# Altium PCB 搅拌杯PCB.PcbDoc
Units mil, origin at the board's own origin, x right, y up, seen from the top; angles counter-clockwise.
Board outline 1417.32 x 1279.53 mil, 2 copper layers (Top Layer, Bottom Layer); 83 components, 49 nets, 213 pads, 50 vias.
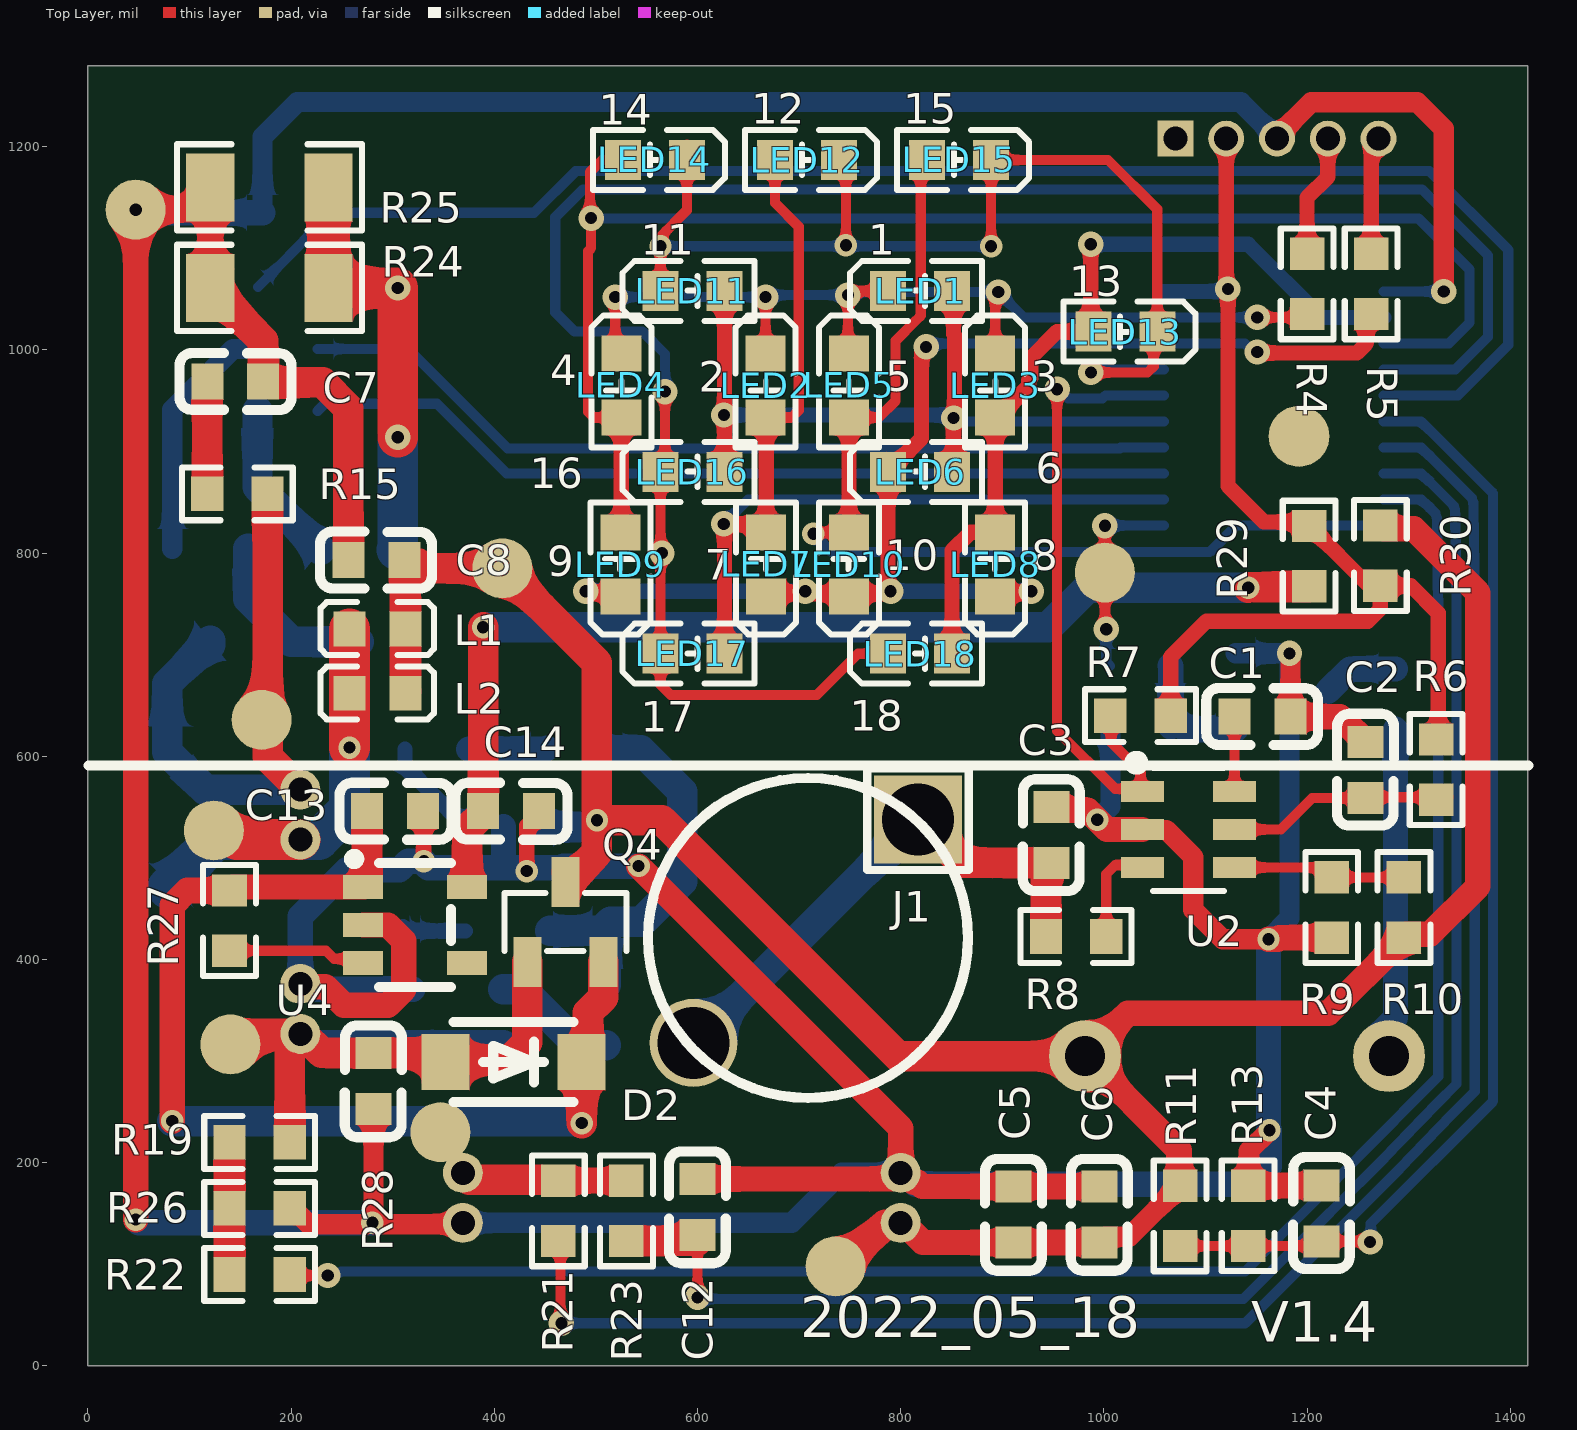
[diagram p0: Top Layer view]
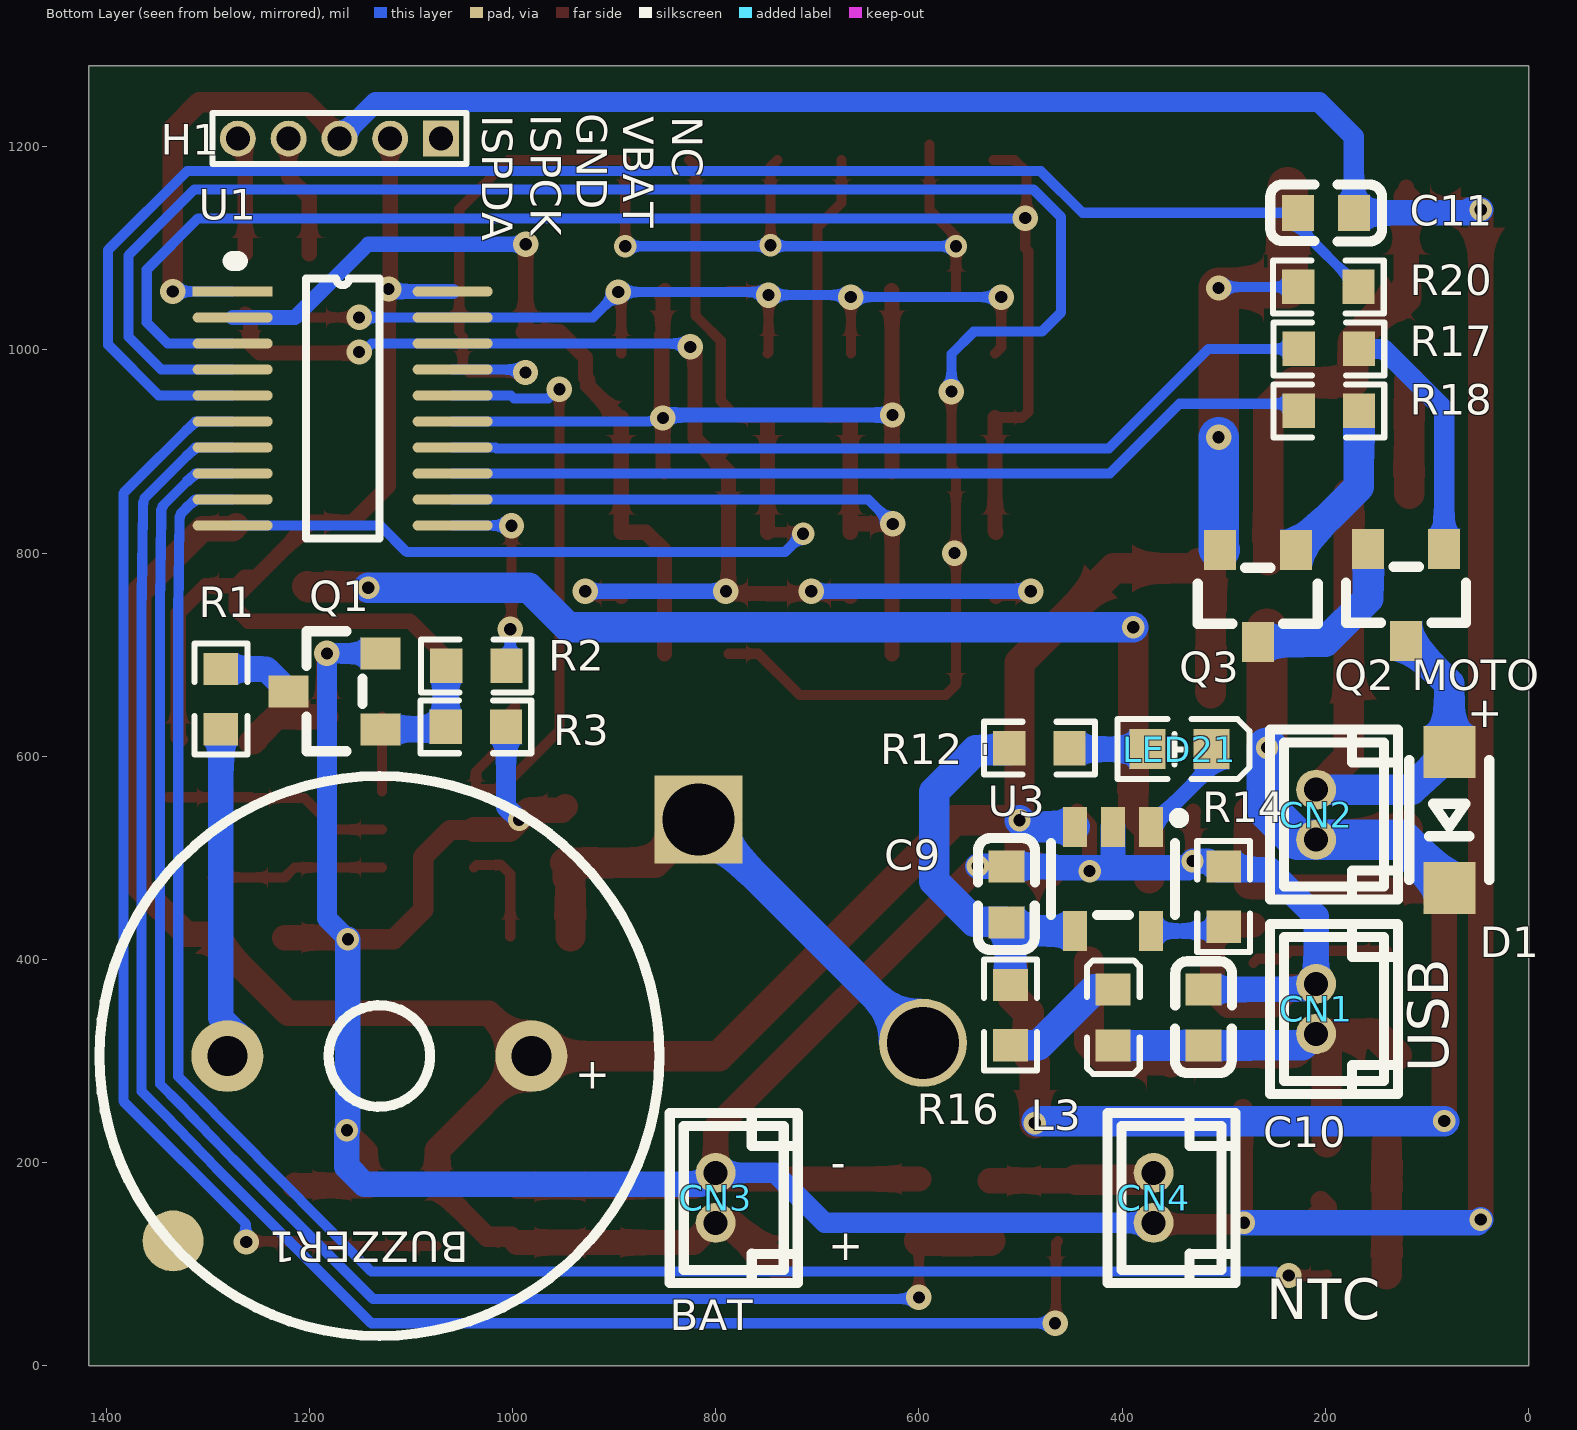
[diagram p1: Bottom Layer view, seen from below]

## Layer stack, top to bottom
Top Solder: solder mask 0.4, Solder Resist, Dk 3.5
Top Layer: signal copper 1.4
Dielectric2: dielectric 12.6, FR-4, Dk 4.8
Bottom Layer: signal copper 1.4
Bottom Solder: solder mask 0.4, Solder Resist, Dk 3.5

## Board outline
0,0 0,1279.53 1417.32,1279.53 1417.32,0

## Design rules (kind name [scope] priority, off if disabled: settings)
Clearance [All] p1: gap=8 ignorepadtopadclearanceinfootprint=FALSE except(0: Arc-Hole Track-Hole SMDPad-Hole THPad-Hole Via-Hole Fill-Hole Poly-Hole Region-Hole Text-Hole)
ComponentClearance [All] p1 off: gap=10 collisioncheckmode=3 verticalgap=10 showdistances=FALSE
PolygonConnect [All] p1: connectstyle=Relief reliefconductorwidth=10 reliefentries=4 polygonreliefangle="90 Angle" airgapwidth=10
RoutingVias [All] p1: holewidth=28 width=50 viastyle="Through Hole" minholewidth=10 minwidth=10 maxholewidth=28 maxwidth=50
SolderMaskExpansion [All] p1: expansion=4 istentingtop=FALSE
Width [All] p1: maxlimit=50 minlimit=8 preferedwidth=10
29 further rules are at their usual default settings.

## Components (designator, comment, footprint, x,y, rotation, side; value= is the part's Value field where it differs from the comment)
BUZZER1 "FMQ-BUZZER2" BUZ-TH_BD12.0-P7.60-D0.6-FD 1131,305 r0 bottom
C1 "4.7nF" C0603 1156,639 r0 top
C2 "0.1u" C0603 1257.24,586.54 r270 top
C3 "nc" C0603 948.22,522.69 r90 top
C4 "0.1u" C0603 1214,150.23 r270 top
C5 "1uF" C0603 911,149 r90 top
C6 "0.1u" C0603 995.5,149 r90 top
C7 "0.1u" C0603 145,969 r180 top
C8 "10uF" C0603 283.81,793 r0 top
C9 "4.7uF" C0603 514,464.19 r270 bottom
C10 "10uF" C0603 320,343 r270 bottom
C11 "0.1u" C0603 199.44,1135 r0 bottom
C12 "0.1u" C0603 600,156.44 r90 top
C13 "10uf" C0603 302.44,546 r180 top
C14 "1u" C0603 416.55,546 r180 top
CN1 "0530470210" CONN-TH_0530470210 209,351.39 r90 bottom
CN2 "0530470210" CONN-TH_0530470210 209,542.61 r90 bottom
CN3 "0530470210" CONN-TH_0530470210 800,165.39 r90 bottom
CN4 "0530470210" CONN-TH_0530470210 369,165.39 r90 bottom
D1 "1N4148W" SOD-123FL_L2.6-W1.6-LS3.4-RD 78,537.33 r270 bottom
D2 "1N5819HW-7-F" SOD-123_L2.8-W1.8-LS3.7-FD 419,299 r0 top
H1 "HDR-F-2.54_1x5" 1.27mm_5PIN 1070.34,1208 r0 bottom
J1 "HDR-M-2.54_1x1" HDR-M-2.54_1X1 817,538 r0 top
L1 "22uH" L0603 285,725.35 r0 top
L2 "22uH" L0603 285,662 r0 top
L3 "BEAD" L0603 409,343 r270 bottom
LED1 "LED-0603_W" LED0603-FD_WHITE 819,1058 r180 top
LED2 "LED-0603_W" LED0603-FD_WHITE 667,965 r90 top
LED3 "LED-0603_W" LED0603-FD_WHITE 893,965 r90 top
LED4 "LED-0603_W" LED0603-FD_WHITE 525,965 r90 top
LED5 "LED-0603_W" LED0603-FD_WHITE 749,965 r90 top
LED6 "LED-0603_W" LED0603-FD_WHITE 819,880 r180 top
LED7 "LED-0603_W" LED0603-FD_WHITE 667.53,789 r270 top
LED8 "LED-0603_W" LED0603-FD_WHITE 893,789 r270 top
LED9 "LED-0603_W" LED0603-FD_WHITE 524,789 r270 top
LED10 "LED-0603_W" LED0603-FD_WHITE 749,789 r270 top
LED11 "LED-0603_W" LED0603-FD_WHITE 595,1058 r180 top
LED12 "LED-0603_W" LED0603-FD_WHITE 707.75,1187 r0 top
LED13 "LED-0603_W" LED0603-FD_WHITE 1021,1018 r0 top
LED14 "LED-0603_W" LED0603-FD_WHITE 558,1187 r0 top
LED15 "LED-0603_W" LED0603-FD_WHITE 857.51,1187 r0 top
LED16 "LED-0603_W" LED0603-FD_WHITE 595,880 r180 top
LED17 "LED-0603_W" LED0603-FD_WHITE 595,701 r180 top
LED18 "LED-0603_W" LED0603-FD_WHITE 819,701 r180 top
LED21 "LED-0603_W" LED0603-FD_WHITE 343.5,607 r180 bottom
Q1 "2N7002" SOT-23_L2.9-W1.3-P0.95-LS2.4-BR 1175.07,664.01 r180 bottom
Q2 "2N7002" SOT-23_L2.9-W1.3-P0.95-LS2.4-BR 120.43,759 r90 bottom
Q3 "2N7002" SOT-23_L2.9-W1.3-P0.95-LS2.4-BR 266.43,758 r90 bottom
Q4 "KI2301" SOT-23-3_L2.9-W1.3-P1.90-LS2.4-BR 470,437 r270 top
R1 "50R" R0603 1287,656.35 r90 bottom
R2 "1K" R0603 1035.66,689 r180 bottom
R3 "100K" R0603 1036.07,629.01 r180 bottom
R4 "100R" R0603 1200,1065 r270 top
R5 "100R" R0603 1263,1065 r270 top
R6 "0R" R0603 1327,587 r90 top
R7 "10K" R0603 1036,640 r0 top
R8 "1K" R0603 972.58,422.69 r180 top
R9 "NC" R0603 1224.24,451.21 r90 top
R10 "NC" R0603 1295.24,451.21 r90 top
R11 "3M" R0603 1075,147.69 r90 top
R12 "1k" R0603 481.35,608 r180 bottom
R13 "1M" R0603 1142,147.79 r270 top
R14 "2k" R0603 300,462 r90 bottom
R15 "1k" R0603 147.1,858.41 r0 top
R16 "0R" R0603 509.84,345.35 r270 bottom
R17 "100R" R0603 196.55,1001 r180 bottom
R18 "100R" R0603 196.55,940 r180 bottom
R19 "1k" R0603 169,220 r0 top
R20 "1k" R0603 197,1062 r180 bottom
R21 "200K" R0603 463,152.64 r90 top
R22 "1k" R0603 169,90 r0 top
R23 "1k" R0603 530,152.64 r270 top
R24 "1R" R1206 178.65,1061 r0 top
R25 "1R" R1206 178.65,1160 r0 top
R26 "100K" R0603 169,155 r0 top
R27 "10k" R0603 139.35,438.35 r90 top
R28 "100k" C0603 281,280.44 r90 top
R29 "0R" R0603 1202,797 r270 top
R30 "0R" R0603 1272,797.57 r90 top
U1 "ES7P0693FHTF" TSOP20 1275.4,1057.54 r180 bottom
U2 "AS01C(AI01)" SOT-23-6_L2.9-W1.6-P0.95-LS2.8-BL 1083.11,528 r270 top
U3 "HE4054B" SOT-23-5_L3.0-W1.7-P0.95-LS2.8-BR 409,479.34 r90 bottom
U4 "RT9013-33GB" SOT-23-5_L3.0-W1.7-P0.95-LS2.8-BR 322,434 r180 top

## Footprints (in the part's own frame and the unit in brackets; to place one, negate y for a bottom-side part, rotate by r counter-clockwise, add the part's x,y. Pads: shape width x height; smd on the part's side, far side on the other; paste and mask are expansions set on the pad)
1.27mm_5PIN [mm]
  rect 0.9x0.9 hole 0.6: 1(0,0)
  round 0.9 hole 0.6: 2(1.27,0) 3(2.54,0) 4(3.81,0) 5(5.08,0)
  silkscreen extent -0.64,-0.64 5.71,0.64
BUZ-TH_BD12.0-P7.60-D0.6-FD [mm]
  round 1.8 hole 1: 1(-3.8,0) 2(3.8,0)
  silkscreen extent -7,-7 7,7
C0603 [mm]
  rect 0.8x0.9 smd: 1(-0.7,0) 2(0.7,0)
  silkscreen extent -1.41,-0.71 1.39,0.72
CONN-TH_0530470210 [mm]
  round 1 hole 0.6: 1(-0.625,0) 2(0.625,0)
  silkscreen extent -2.13,-2.05 2.13,1.15
HDR-M-2.54_1X1 [mm]
  rect 2.2x2.2 hole 1.8: 1(0,0)
  silkscreen extent -1.27,-1.27 1.27,1.27
L0603 [mm]
  rect 0.8x0.864 smd: 1(-0.7,0) 2(0.7,0)
  silkscreen extent -1.42,-0.65 1.41,0.67
LED0603-FD_WHITE [mm]
  rect 0.9x1 smd: 1(-0.8,0) 2(0.8,0)
  silkscreen extent -1.55,-0.75 1.75,0.75
R0603 [mil]
  rect 31.75x34.02 smd: 1(-29.65,0) 2(29.65,0)
  silkscreen extent -55,-26 55,26
R1206 [mil]
  rect 47.54x66.97 smd: 1(-58.22,0) 2(58.22,0)
  silkscreen extent -91,-42 91,42
SOD-123_L2.8-W1.8-LS3.7-FD [mm]
  rect 1.2x1.4 smd: 1(-1.7,0) 2(1.7,0)
  silkscreen extent -1.5,-1 1.5,1
SOD-123FL_L2.6-W1.6-LS3.4-RD [mm]
  rect 1.3x1.3 smd: 1(1.7,0) 2(-1.7,0)
  silkscreen extent -1.5,-1 1.5,1
SOT-23-3_L2.9-W1.3-P1.90-LS2.4-BR [mm]
  rect 1.25x0.7 smd: 1(1,-0.95) 2(1,0.95) 3(-1,0)
  silkscreen extent -0.73,-1.53 0.73,1.53
SOT-23-5_L3.0-W1.7-P0.95-LS2.8-BR [mm]
  rect 1x0.6 smd: 1(1.3,-0.95) 2(1.3,0) 3(1.3,0.95) 4(-1.3,0.95) 5(-1.3,-0.95)
  silkscreen extent -0.9,-1.78 1.65,1.55
SOT-23-6_L2.9-W1.6-P0.95-LS2.8-BL [mm]
  rect 0.532x1.072 smd: 1(-0.95,-1.149) 2(0,-1.149) 3(0.95,-1.149) 4(0.95,1.149) 5(0,1.149) 6(-0.95,1.149)
  silkscreen extent -1.82,-1.45 1.54,0.89
SOT-23_L2.9-W1.3-P0.95-LS2.4-BR [mm]
  rect 1x0.8 smd: 1(1.15,-0.95) 2(1.15,0.95) 3(-1.15,0)
  silkscreen extent -0.7,-1.5 0.7,1.5
TSOP20 [mm]
  rect 2x0.25 smd: 1(0,0)
  oval 2x0.25 smd: 2(0,-0.65) 3(0,-1.3) 4(0,-1.95) 5(0,-2.6) 6(0,-3.25) 7(0,-3.9) 8(0,-4.55) 9(0,-5.2) 10(0,-5.85) 11(5.5,-5.85) 12(5.5,-5.2) 13(5.5,-4.55) 14(5.5,-3.9) 15(5.5,-3.25) 16(5.5,-2.6) 17(5.5,-1.95) 18(5.5,-1.3) 19(5.5,-0.65) 20(5.5,0)
  silkscreen extent 0,-6.18 3.66,0.76

## Part data
BUZZER1: BOM_JLCPCB Part Class="Extended Part", BOM_Manufacturer Part=FMQ-BUZZER2, BOM_Supplier=LCSC, BOM_Supplier Part=C9900006103, Contributor=LCSC, spicePre=B, spiceSymbolName=FMQ-BUZZER2
C13: BOM_Manufacturer="TAIYO YUDEN", BOM_Manufacturer Part=JMK105CBJ106MV-F, BOM_Supplier=LCSC, BOM_Supplier Part=C87148, Contributor=LCEDA_Lib, nameAlias=Value(F), spicePre=C, spiceSymbolName=C_0805_US
CN1 CN2 CN3 CN4: BOM_JLCPCB Part Class="Extended Part", BOM_Manufacturer=MOLEX, BOM_Manufacturer Part=0530470210, BOM_Supplier=LCSC, BOM_Supplier Part=C114130, Contributor=LCSC, spicePre=C, spiceSymbolName=0530470210
D1: BOM_Manufacturer="Tak Cheong", BOM_Manufacturer Part=1N4148W, BOM_Supplier=LCSC, BOM_Supplier Part=C129216, Contributor=LCEDA_Lib, spicePre=D, spiceSymbolName=1N4148W
D2: BOM_JLCPCB Part Class="Extended Part", BOM_Manufacturer=DIODES, BOM_Manufacturer Part=1N5819HW-7-F, BOM_Supplier=LCSC, BOM_Supplier Part=C82544, spicePre=D, spiceSymbolName=1N5819HW-7-F
L3: library part 22uH, Contributor=LCEDA_Lib, nameAlias=Value(H), spicePre=L, spiceSymbolName=L0603_US
LED1 LED2 LED3 LED4 LED5 LED6 LED7 LED8 LED9 LED10 LED11 LED12 LED13 LED14 LED15 LED16 LED17 LED18 LED21: BOM_Manufacturer=EVERLIGHT(台湾亿光), BOM_Manufacturer Part=17-21SURC/S530-A3/TR8, BOM_Supplier Part=C72037, Contributor=LCEDA_Lib, spicePre=L, spiceSymbolName=LED-0805_R
Q1 Q2 Q3: BOM_Manufacturer=Nexperia, BOM_Manufacturer Part=2N7002,215, BOM_Paste Type=expand, BOM_Supplier=LCSC, BOM_Supplier Part=C65189, Contributor=LCEDA_Lib, image=//image.lceda.cn/szlcsc/C65189.jpg, spicePre=Q, spiceSymbolName=2N7002
Q4: BOM_JLCPCB Part Class="Extended Part", BOM_Manufacturer=LGE, BOM_Manufacturer Part=KI2301, BOM_Supplier=LCSC, BOM_Supplier Part=C688914, Contributor=LCSC, spicePre=Q, spiceSymbolName=KI2301
R1: library part 100R, Contributor=LCEDA_Lib, nameAlias=Value(Ω), spicePre=R, spiceSymbolName=R_0603_EU
R3: library part 1K, Contributor=LCEDA_Lib, nameAlias=Value(Ω), spicePre=R, spiceSymbolName=R_0603_EU
R6 R7 R16 R29 R30: library part NC, Contributor=LCEDA_Lib, nameAlias=Value(Ω), spicePre=R, spiceSymbolName=R_0603_EU
R11: library part 430k, Contributor=LCEDA_Lib, nameAlias=Value(Ω), spicePre=R, spiceSymbolName=R_0603_EU
R13: library part 430K, Contributor=LCEDA_Lib, nameAlias=Value(Ω), spicePre=R, spiceSymbolName=R_0603_EU
R14: library part 1k, Contributor=LCEDA_Lib, nameAlias=Value(Ω), spicePre=R, spiceSymbolName=R_0603_EU
R21 R26: library part 33K, Contributor=LCEDA_Lib, nameAlias=Value(Ω), spicePre=R, spiceSymbolName=R_0603_EU
U2: BOM_JLCPCB Part Class="Extended Part", BOM_Manufacturer=Sam&wing, BOM_Manufacturer Part=AS01C(AI01), BOM_Supplier=LCSC, BOM_Supplier Part=C389617, Contributor=LCSC, spicePre=U, spiceSymbolName=AS01C(AI01)
U3: BOM_JLCPCB Part Class="Extended Part", BOM_Manufacturer=HEERMICR, BOM_Manufacturer Part=HE4054B, BOM_Supplier=LCSC, BOM_Supplier Part=C711953, Contributor=LCSC, spicePre=U, spiceSymbolName=HE4054B
U4: BOM_JLCPCB Part Class="Extended Part", BOM_Manufacturer=RICHTEK, BOM_Manufacturer Part=RT9013-33GB, BOM_Supplier=LCSC, BOM_Supplier Part=C47773, spicePre=U, spiceSymbolName=RT9013-33GB
C1 C2 C3 C8 C9 C10 C14: Contributor=LCEDA_Lib, nameAlias=Value(F), spicePre=C, spiceSymbolName=C_0805_US
C4 C5 C6 C7 C11 C12: Contributor=LCEDA_Lib, nameAlias=Value(F), spicePre=C, spiceSymbolName=C_0603_US
H1: BOM_Supplier=LCSC, BOM_Supplier Part=C50950, Contributor=LCEDA_Lib, spicePre=H, spiceSymbolName=HDR-F-2.54_1x5
J1: BOM_Supplier=LCSC, BOM_Supplier Part=C81276, Contributor=LCEDA_Lib, spicePre=J, spiceSymbolName=HDR-M-2.54_1x1
L1 L2: Contributor=LCEDA_Lib, nameAlias=Value(H), spicePre=L, spiceSymbolName=L0603_US
R2 R4 R5 R8 R9 R10 R12 R15 R17 R18 R19 R20 R22 R23 R24 R25 R27 R28: Contributor=LCEDA_Lib, nameAlias=Value(Ω), spicePre=R, spiceSymbolName=R_0603_EU
U1: Contributor=zime_zl, spicePre=U, spiceSymbolName=ES7P0693FHTF

## Free pads (board coordinates)
  round 86.61 hole 70.87: 0(596,318)
  round 59.06 smd: 2(47,1138) 2(124,527) 2(140.25,316.39) 2(171,636) 2(347,230) 2(408,785) 2(736,98) 2(1001,780.9)
  round 60 smd: 3(1192,915)
  round 100 on Top Solder: 3(1192,915)
  round 60 smd far side: 3(1334,123)
  round 100 on Bottom Solder: 3(1334,123)

## Via types
v1: diameter 25, hole 12, Top Layer to Bottom Layer, tented both sides, 31 vias
v2: diameter 22, hole 12, Top Layer to Bottom Layer, tented both sides, 19 vias

## Nets (pads, with @x,y where several pads share a name; then routed paths per layer and width w, separated by ;. In a path a pad name is that pad's centre, name@x,y a point inside that pad or via, vN(x,y) a via of type N, cw(c..) or ccw(c..) an arc to the next point about the centre after c; other vN are vias at no path point)
BUZZER: pad.2@1001,780.9 R2.2 U1.11 | length 198
  Top Layer w10: v1(1001,827) 1001,780.9 1001,726.27 v1(1002.21,725.06)
  Bottom Layer w10: v1(1001,827) 1001.22,827.22 U1.11 ; v1(1002.21,725.06) 1002.21,692.79 R2.2
GND: C1.2 C2.1 C3.2 C4.1 C5.2 C6.2 C7.1 C8.1 C9.1 C10.1 C11.1 C12.2 C13.1 C14.1 CN1.2 CN3.2 CN4.1 H1.3 pad.2@47,1138 Q1.2 R3.2 R9.1 R13.1 R14.2 R24.1 R25.1 R26.2 R28.1 U1.1 U2.2 U3.2 U4.2 | length 7514.6
  Top Layer w15: R25.1@120.43,1150.29 R25.1 ; C13.1 330.33,545.67 330.33,497.19 v2(330.66,496.86) ; v2(432,487) 432,531.92 444.11,544.03 C14.1
  Top Layer w20: R26.2 198.65,153.87 204.53,147.99 209.03,147.99 217.49,139.54 v2@274.46,139.54 ; R26.2@198.65,156.13 R26.2@204.53,162.01 ; v2@281,141 R28.1 ; v2@281.78,139.54 CN4.1@367.76,139.54 ; U2.2 1038.35,527.53 1061.47,527.53 1088,501 1088,449 1117,420 v2(1162,420) ; R13.1 1142.6,178.04 1142.6,211.6 v2(1163,232) ; H1.3 1170.34,1210.11 1203.95,1243.72 1308.57,1243.72 1334.46,1217.82 v1(1334.46,1057.54) ; v1(1182.66,701.3) 1183.55,700.4 C1.2
  Top Layer w25: v2(47,144) v2(47,1138) 98.43,1138 99.45,1139.02 109.16,1139.02 120.43,1150.29 R24.1 ; CN1.2@206.25,373.25 CN1.2 211.75,373.25 233.68,373.25 251.93,355 295.35,355 311.01,370.65 311.01,418.35 295.35,434 U4.2 ; v2(542,492) 800,234 CN3.2 796.11,190 790.11,184 C12.2 ; CN3.2@812.92,180.96 816.65,180.96 821.05,176.56 C5.2 C6.2 ; C3.2 951.47,547 984,547 v2(993.5,537.5) 1003,528 U2.2 ; R13.1 1213.66,177.44 C4.1 ; v2(1162,420) 1171,420 1172.56,421.56 R9.1 ; C1.2 1232.33,639 1252.02,619.31 1252.02,617.34 1255.27,614.1 C2.1
  Top Layer w30: R24.1 120.43,1051.29 129.2,1042.52 138.92,1042.52 172.56,1008.88 C7.1 172.56,968.75 173.3,968 231,968 256.26,942.74 C8.1
  Bottom Layer w10: U1.1 v1(1334.46,1057.54)
  Bottom Layer w20: C11.1 171.89,1209.89 206,1244 1134.85,1244 1170.34,1208.51 H1.3 ; CN4.1 692.78,140.78 742,190 CN3.2 ; v2(993.5,537.5) 1006.41,550.41 R3.2 ; Q1.2 1129.89,701.3 v1(1182.66,701.3) 1182.66,440.66 v2(1162,420) ; v2@1162,233 v2(1163,232)
  Bottom Layer w25: v2(47,144) 50,141 v2(280,141) ; v2(47,1138) 57,1138 60,1135 C11.1 ; CN1.2 209,442.51 254.77,488.28 306.62,488.28 315.2,496.86 v2(330.66,496.86) ; CN1.2@224.61,370.56 C10.1 ; v2@332,493 334.67,490.33 409,490.33 ; U3.2 409,490.33 ; v2(542,492) 514.25,492 C9.1 468.12,491.75 466.7,490.33 409,490.33 ; CN3.2 803.89,190 814.89,179 1146,179 1163,196 v2(1163,232) ; v2@1162,233 v2(1162,420)
IO_OUT: R21.1 U1.7 | length 1768
  Top Layer w10: R21.1 465,120.98 465,43 v1(466,42)
  Bottom Layer w10: v1(466,42) 1138.86,42 1139.12,42.16 1291.01,194.05 ccw(c1283.94,201.12) 1291.14,194.18 1342.45,247.44 cw(c1349.66,240.5) 1342.58,247.57 1365.04,270.03 1365.04,753.59 ccw(c1355.04,753.59) 1365.03,753.93 1364.99,755.16 cw(c1374.99,755.5) 1364.99,755.31 1363.68,845.23 1363.51,849.81 1362.06,854.3 1312.37,904 U1.7
ISPCK: H1.4 R4.1 | length 127.8
  Top Layer w15: R4.1 1200,1150 1220.34,1170.34 H1.4 H1.4@1220.34,1214
ISPDA: H1.5 R5.1 | length 122.4
  Top Layer w15: R5.1 1263,1206.66 H1.5@1270.34,1214
LED_IO_0: LED1.2 LED2.2 LED3.2 LED4.2 LED5.2 R4.2 U1.19 | length 976.8
  Top Layer w10: v1(519,1052) 519,1002.49 LED4.2 ; LED2.2 v1(667,1052) ; LED5.2 748,997.49 v1(748,1054) 752,1058 LED1.2 ; LED3.2 893,1054 v1(896,1057) ; v1(1151,1032) R4.2@1202.94,1032
  Bottom Layer w10: v1(519,1052) v1(667,1052) 669,1054 v1(748,1054) 745,1057 v1(896,1057) 921.05,1031.95 v1(1151,1032) v1(1151,1032)
LED_IO_1: LED6.2 LED7.2 LED8.2 LED9.2 LED10.2 R5.2 U1.18 | length 1287.2
  Top Layer w15: v1(490,762.5) 491.91,760.59 520.92,760.59 LED9.2 ; LED7.2 670.61,760.59 704.09,760.59 v1(706,762.5) ; v1@706,760 749,760 749.32,760.32 785.11,760.32 787.29,762.5 v1(790,762.5) ; v1@787.51,760 LED6.2 ; LED6.2@789,881.49 820.5,912.99 820.5,999.5 822,998 826,1002 v1(825,1003) ; LED8.2 896.08,760.59 926.47,760.59 v1(928.39,762.5) ; v1(1151,998) 1152,997 1249.07,997 1257.85,1005.79 1257.85,1030.2 R5.2
  Bottom Layer w10: v1(825,1003) 829.06,1003 832.42,1006.36 1138.58,1006.36 1146.94,998 v1(1151,998)
  Bottom Layer w15: v1(490,762.5) v1(706,762.5) ; v1(790,762.5) v1(928.39,762.5)
LED_IO_2: LED11.2 LED12.2 LED13.2 LED14.2 LED15.2 U1.17 | length 1122.1
  Top Layer w10: LED11.2 v2(563.51,1102) 563.51,1111.51 589.49,1137.49 LED14.2 LED14.2@589.49,1202.18 ; LED12.2 746,1180.25 v2(746,1103) ; v2(889,1102) LED15.2 1004,1187 1052.49,1138.51 LED13.2 ; v1(987.18,977.82) 1042.82,977.82 1049,984 LED13.2@1049,1012.54
  Bottom Layer w10: v2(563.51,1102) v2(889,1102) ; v1(987.18,977.82) 991.24,977.82 994.2,980.77 U1.17
LED_IO_3: LED16.2 LED17.2 LED18.2 U1.4 | length 1948.3
  Top Layer w10: v1(568,959) 568,884.49 LED16.2 LED17.2 563.51,670.49 573.56,660.44 717.44,660.44 758,701 LED18.2
  Bottom Layer w10: v1@564,800 v1(565,800) v1@568,803 ; v1(568,959) 568,996 546,1018 479,1018 460,1037 460,1130.54 487.46,1158 1313,1158 1377.96,1093.04 1377.96,1012.96 1345.77,980.77 U1.4
LED_IO_4: LED1.1 LED6.1 LED11.1 LED16.1 U1.15 | length 800.4
  Top Layer w15: LED16.1 LED11.1 LED11.1@627,1058.5 ; LED1.1@850,1058.5 LED1.1 854,1054.5 852,1052.5 852,1015.6 853,1014.6 853,934 v1(852,933) ; LED6.1 852,881.5 v1(852,933) ; v1@852,935 v1(852,933)
  Bottom Layer w10: v1(852,933) 854.87,930.13 864.82,930.13 865.36,929.59 U1.15
  Bottom Layer w15: v1(626,936) 852,936 v1(852,933)
LED_IO_5: LED2.1 LED7.1 LED12.1 LED17.1 U1.12 | length 1009.1
  Top Layer w10: LED2.1 692.5,933.5 699.68,940.68 699.68,1121.32 676.26,1144.74 LED12.1
  Top Layer w15: v1(625.82,828.82) v1@626.5,828.82 ; LED17.1 v1@626.5,828.82 ; LED7.1@659.21,828.82 v1@626.5,828.82 ; LED2.1 667.53,932.97 LED7.1
  Bottom Layer w10: v1(625.82,828.82) 649.82,852.82 U1.12
LED_IO_6: LED3.1 LED8.1 LED13.1 LED18.1 U1.2 | length 815.2
  Top Layer w15: LED18.1 850.5,802.5 868.5,820.5 LED8.1 LED3.1 894.97,933.5 925.89,964.42 925.89,970.06 928.18,972.36 928.18,992.33 953.86,1018 LED13.1 ; LED13.1@987,1018 v1(987,1104)
  Bottom Layer w15: v1(987,1104) 1142,1104 1214.05,1031.95 U1.2
LED_IO_7: LED4.1 LED9.1 LED14.1 U1.3 | length 1452.6
  Top Layer w10: v1@494,1131 494,1175 506,1187 LED14.1 ; v1(495.26,1129.74) 495.26,1100.19 492.31,1097.24 492.31,939.19 498,933.5 LED4.1
  Top Layer w15: LED9.1 525,821.49 LED4.1
  Bottom Layer w10: v1(495.26,1129.74) 495.5,1129.5 1309.5,1129.5 1359.96,1079.04 1359.96,1026.96 1339.36,1006.36 U1.3
LED_IO_8: LED5.1 LED10.1 LED15.1 U1.10 | length 1031.1
  Top Layer w10: v2(714,819) 715.5,820.5 LED10.1 ; LED5.1 778.5,933.5 795,950 795,1009.06 815.44,1029.5 815.5,1029.5 819.78,1033.78 819.78,1180.78 LED15.1
  Top Layer w15: LED10.1 LED5.1
  Bottom Layer w10: v2(714,819) 732,801 1104,801 1130.22,827.22 U1.10
MOTO_CONTROL_A: R17.1 U1.14 | length 873.6
  Bottom Layer w10: R17.1 315,1001 412.9,903.1 1015.8,903.1 1016.61,903.92 1058.78,903.92 U1.14
MOTO_CONTROL_B: R18.1 U1.13 | length 864
  Bottom Layer w10: R18.1 233.21,947 343.54,947 412.13,878.41 U1.13
MOTO_CURRERN: C11.2 R20.2 U1.5 | length 1554.5
  Bottom Layer w10: R20.2 227,1121.66 C11.2 439,1135 480,1176 1320.46,1176 1398,1098.46 1398,1005 1348.18,955.18 U1.5
NetBUZZER1_2: BUZZER1.2 R1.1 | length 332.6
  Bottom Layer w25: BUZZER1.2@1260.61,305 1260.61,316.18 1287,342.58 R1.1
NetC1_1: C1.1 U2.6 | length 73.6
  Top Layer w10: U2.6 1128.45,565.5 C1.1
NetC2_2: C2.2 R6.1 U2.5 | length 223.7
  Top Layer w10: U2.5 1174,528 1204.99,558.99 C2.2 ; C2.2@1257.24,559.69 R6.1@1339.24,559.69
NetC3_1: C3.1 J1.1 pad.0 R8.2 | length 534.9
  Top Layer w30: J1.1 859.87,495.13 C3.1@946.25,495.13 ; R8.2 942.93,477.59 945.5,480.17 945.5,494.39 C3.1@946.25,495.13 ; C3.1 C3.1@946.25,495.13
  Bottom Layer w30: pad.0 597,318 J1.1
NetC7_2: C7.2 R15.1 | length 110.6
  Top Layer w30: R15.1 C7.2
NetC9_2: C9.2 R12.1 R16.1 U3.4 | length 391
  Bottom Layer w30: U3.4@455,428.16 505.52,428.16 C9.2@509.84,432.48 ; R16.1 C9.2@509.84,432.48 ; R12.1@513,606 R12.1 511,606.87 511.88,605.99 544.01,605.99 585,565 585,477 545.39,437.39 514.75,437.39 C9.2@509.84,432.48
NetC13_2: C13.2 D2.2 Q4.2 R27.2 U4.1 | length 1076.2
  Top Layer w10: Q4.2@498.62,417.24 504,411.86 504,401.03 Q4.2
  Top Layer w25: v2(83,241) 83,453.36 97.64,468 R27.2 142.72,471.38 157.93,471.38 271.7,471.4 U4.1@274.89,474.59
  Top Layer w30: U4.1@274.89,474.59 C13.2 ; v2(486,239) 485.93,239.07 D2.2 492.09,305.17 492.09,347.65 507.4,362.96 Q4.2
  Bottom Layer w30: v2(83,241) v2@484,241
NetCN2_1: CN2.1 D1.1 L1.1 L2.1 pad.2@124,527 | length 477.5
  Top Layer w40: pad.2@124,527 127.65,523.35 141.12,523.35 146.47,518 CN2.1 ; v2(257.44,608.56) L2.1 L1.1
  Bottom Layer w40: D1.1 125.6,518 CN2.1 227.22,518 257.44,548.23 v2(257.44,608.56)
NetCN2_2: CN2.2 D1.2 pad.2@171,636 Q2.3 R15.2 | length 580.2
  Top Layer w30: R15.2 176.76,599.46 CN2.2
  Bottom Layer w30: Q2.3 120.43,709.79 119.69,709.04 115.75,709.04 78,671.29 D1.2 115.04,567.22 CN2.2
NetCN4_2: CN4.2 pad.2@347,230 R21.2 R23.1 | length 164.2
  Top Layer w25: 445,183.46 446.17,182.29 R21.2 R23.1
  Top Layer w30: CN4.2 375.54,183.46 445,183.46
NetL3_1: L3.1 R16.2 | length 123.6
  Bottom Layer w30: L3.1 427.44,370.56 482.31,315.69 R16.2
NetLED21_1: LED21.1 R12.2 | length 77.1
  Bottom Layer w25: LED21.1 450.69,607 R12.2
NetLED21_2: LED21.2 U3.1 | length 101.2
  Bottom Layer w15: LED21.2 312.01,590.11 U3.1
NetQ1_1: Q1.1 R2.1 R3.1 | length 124.5
  Bottom Layer w25: R2.1 1065.72,688.59 R3.1 ; R3.1@1069.72,637.01 1080.13,626.6 Q1.1
NetQ1_3: Q1.3 R1.2 | length 75.8
  Bottom Layer w25: Q1.3 1242.34,686 R1.2
NetQ2_1: Q2.1 R17.2 | length 245.5
  Bottom Layer w20: Q2.1 83.03,941.03 143,1001 R17.2
NetQ2_2: Q2.2 Q3.3 | length 175.3
  Bottom Layer w30: Q2.2 157.84,755.16 200.28,712.72 Q3.3
NetQ3_1: Q3.1 R18.2 | length 162.5
  Bottom Layer w30: R18.2 166.9,865.4 Q3.1
NetQ3_2: Q3.2 R20.1 R24.2 R25.2 | length 504.1
  Top Layer w40: R25.2 R24.2 v1(305,1061) v1(305,914)
  Bottom Layer w10: R20.1 304,1062 v1(305,1061)
  Bottom Layer w40: Q3.2 305,804.44 v1(305,914)
NetR8_1: R8.1 U2.3 | length 101.8
  Top Layer w10: R8.1 1002.24,484.24 1011,493 1035.47,493 U2.3
NetR9_2: R9.2 R10.2 U2.4 | length 170.9
  Top Layer w10: U2.4 1214.51,490.6 R9.2 R10.2
NetR14_1: R14.1 U3.5 | length 63.3
  Bottom Layer w15: R14.1@310,432.35 314.19,428.15 U3.5
NetR19_1: R19.1 R22.1 R26.1 | length 130
  Top Layer w30: R22.1 R26.1 R19.1
NetR27_1: R27.1 U4.3 | length 136.5
  Top Layer w10: R27.1 234.31,408.69 242.26,400.75 266.68,400.75 U4.3
NTC_IN: C12.1 R23.2 U1.8 | length 1612.6
  Top Layer w10: C12.1@599.91,122.98 600,122.89 v1(600,67.5)
  Top Layer w30: R23.2 C12.1@599.91,122.98
  Bottom Layer w10: v1(600,67.5) 601.5,66 1133.37,66 1137.4,66 1220.16,148.65 1226.02,154.5 1275.5,203.99 ccw(c1268.4,211.03) 1275.6,204.09 1328.16,258.61 1347.04,277.48 1347.04,746.14 ccw(c1337.04,746.14) 1347.03,746.47 1346.99,747.7 cw(c1356.99,748.03) 1346.99,747.85 1345.77,837.78 1345.68,842.19 1344.06,846.85 1312.5,878.41 U1.8
TOUCH_IN: R7.1 U1.16 U2.1 | length 654.6
  Top Layer w10: v1(953.89,961.25) 953.89,625.11 1011,568 1035.28,568 U2.1@1035.98,567.29 ; R7.1@997.24,649.11 1007.15,639.19 1007.15,613.85 1035.98,585.02 U2.1@1035.98,567.29 ; U2.1 U2.1@1035.98,567.29
  Bottom Layer w10: v1(953.89,961.25) v1@955.92,961.25 ; v1@957.95,961.25 v1@955.92,961.25 ; U1.16 1001.43,955.18 998.56,952.32 964.85,952.32 v1@955.92,961.25
USB_CHECK: R22.2 U1.9 | length 1823.5
  Top Layer w10: R22.2 199.65,89 v1(236,89)
  Bottom Layer w10: v1(236,89) 238.87,91.87 248.23,91.87 249.36,93 1138.95,93 1144.8,98.86 1315,270.9 1329.04,284.94 1329.04,306.94 1329,306.98 1329,739.56 1327.77,834.64 1326.06,839.39 1312.65,852.81 U1.9
USB_IN: C10.2 CN1.1 D2.1 L3.2 pad.2@140.25,316.39 Q4.1 R19.2 R28.2 | length 742.4
  Top Layer w30: pad.2@140.25,316.39 129.86,306 150.64,326.78 CN1.1 ; R19.2 198.65,313.9 209,324.24 CN1.1 ; Q4.1 432.6,318.57 415.02,301 354.07,301 D2.1 352.07,299.38 343.45,308 R28.2 230.32,308 211.54,326.78 CN1.1
  Bottom Layer w30: CN1.1@207.79,327.99 210.33,327.99 222.87,315.44 C10.2 L3.2
V3_3: C14.2 R29.2 U4.5 | length 1083.3
  Top Layer w30: U4.5@373.19,480 373.19,528.22 389,544.03 C14.2 389,718 v2(389,727) ; v2(1142,766) 1142.47,766.47 1201.12,766.47 R29.2
  Bottom Layer w30: v2(389,727) 945,727 984,766 v2(1142,766)
VBAT: BUZZER1.1 C5.1 C6.1 C8.2 CN3.1 L1.2 L2.2 pad.2@408,785 pad.2@736,98 Q4.3 R10.1 R11.2 R30.2 U3.3 | length 2643.7
  Top Layer w20: C6.1 1001.25,127.19 1024.85,127.19 1067.99,170.34 1067.99,171.47 1073.87,177.35 R11.2
  Top Layer w25: CN3.1 802.5,140.78 821.83,121.45 C5.1 C6.1 ; R11.2 1074.07,178.28 1074.07,212.33 BUZZER1.1 1023.39,347 1220.68,347 1290.73,417.05 1290.73,418.18 1297.48,424.93 1320.93,424.93 1368,472 1368,761 1305.16,823.84 1275.38,823.84 R30.2
  Top Layer w30: C8.2 311.37,791.03 C8.2@312.12,790.28 ; L2.2@313.3,664.01 312.56,663.27 L2.2 L1.2 312.56,789.84 C8.2@312.12,790.28 ; Q4.3@471.22,485.97 482.21,485.97 501,504.77 v2(501,537) ; pad.2@736,98 784.99,138.99 798.21,138.99 CN3.1 ; BUZZER1.1 797,305 565,537 v2(501,537) ; C8.2@312.12,790.28 324.41,790.28 329.69,785 408,785 501,692 v2(501,537)
  Bottom Layer w30: U3.3 494.52,530.52 v2(501,537)
VBAT_IN: C4.2 R11.1 R13.2 U1.6 | length 1113.1
  Top Layer w10: R11.1 1141.9,118.04 R13.2 1209.45,118.13 C4.2 1261.32,122.68 v1(1262,122)
  Bottom Layer w10: v1(1262,122) 1262.66,122.66 1262.66,140.23 1383.04,260.62 1383.04,858.78 1380.07,861.75 1312.23,929.59 U1.6
VDD: H1.2 R6.2 R7.2 R29.1 R30.1 U1.20 | length 1112.8
  Top Layer w15: R7.2 1065.66,697.65 1101,733 1260,733 1272,745 1272,756.65 1252.37,776.29 ; H1.2 1120.34,1061.66 v1(1122,1060) 1122,866 1157.34,830.65 1198,830.65 1200,828.65 R29.1@1201.13,828.65 ; R29.1 1203.13,826.65 1211.51,818.28 1211.51,817.15 1252.37,776.29 ; R6.2 1329,618.65 1329,741 1302.09,767.91 R30.1 1263.62,776.29 1252.37,776.29
  Bottom Layer w15: U1.20 1119.54,1057.54 v1(1122,1060)
pads on no net: H1.1 U4.4

## Silkscreen, mask and mechanical layers (free items; w line width, h text height)
Top Overlay:
  circle w10: c708.66,421.29 r157.48
  lines w10: 0.57,591.09 1417.89,591.09
  text "12" at 652.73,1222.53 h30
  text "15" at 802.48,1222.53 h30
  text "14" at 502.98,1221.74 h30
  text "11" at 543.91,1093.53 h30
  text "1" at 767.91,1093.53 h30
  text "13" at 965.98,1052.74 h30
  text "4" at 455,965 h30
  text "2" at 601,959 h30
  text "5" at 784.53,959.19 h30
  text "3" at 928.53,959.19 h30
  text "6" at 933,869 h30
  text "16" at 435,864 h30
  text "10" at 784.53,783.19 h30
  text "8" at 928.53,783.19 h30
  text "9" at 452,777 h30
  text "7" at 607,774 h30
  text "18" at 750,625 h30
  text "17" at 544,624 h30
  text "2022_05_18" at 701,28 h40
  text "V1.4" at 1145,24 h40
Bottom Overlay:
  text "GND" at 937,1233 h30 r90
  text "ISPCK" at 982,1232 h30 r90
  text "ISPDA" at 1030,1231 h30 r90
  text "NC" at 843,1230 h30 r90
  text "VBAT" at 891,1230 h30 r90
  text "MOTO" at 115,665 h30
  text "+" at 30,624 h30 r270
  text "-" at 523,599 h30 r270
  text "USB" at 79,289 h40 r270
  text "-" at 687,185 h30
  text "+" at 689,104 h30
  text "NTC" at 258,46 h40
  text "BAT" at 845,35 h30
Mechanical 1:
  the board outline again, w10

## Text inside footprints (layer, text, board x,y; h text height)
BUZZER1: Bottom Overlay "+" at 904,299 h30 r180